# EAGLE board Esquematico_Encoder (EAGLE 9.6.2)
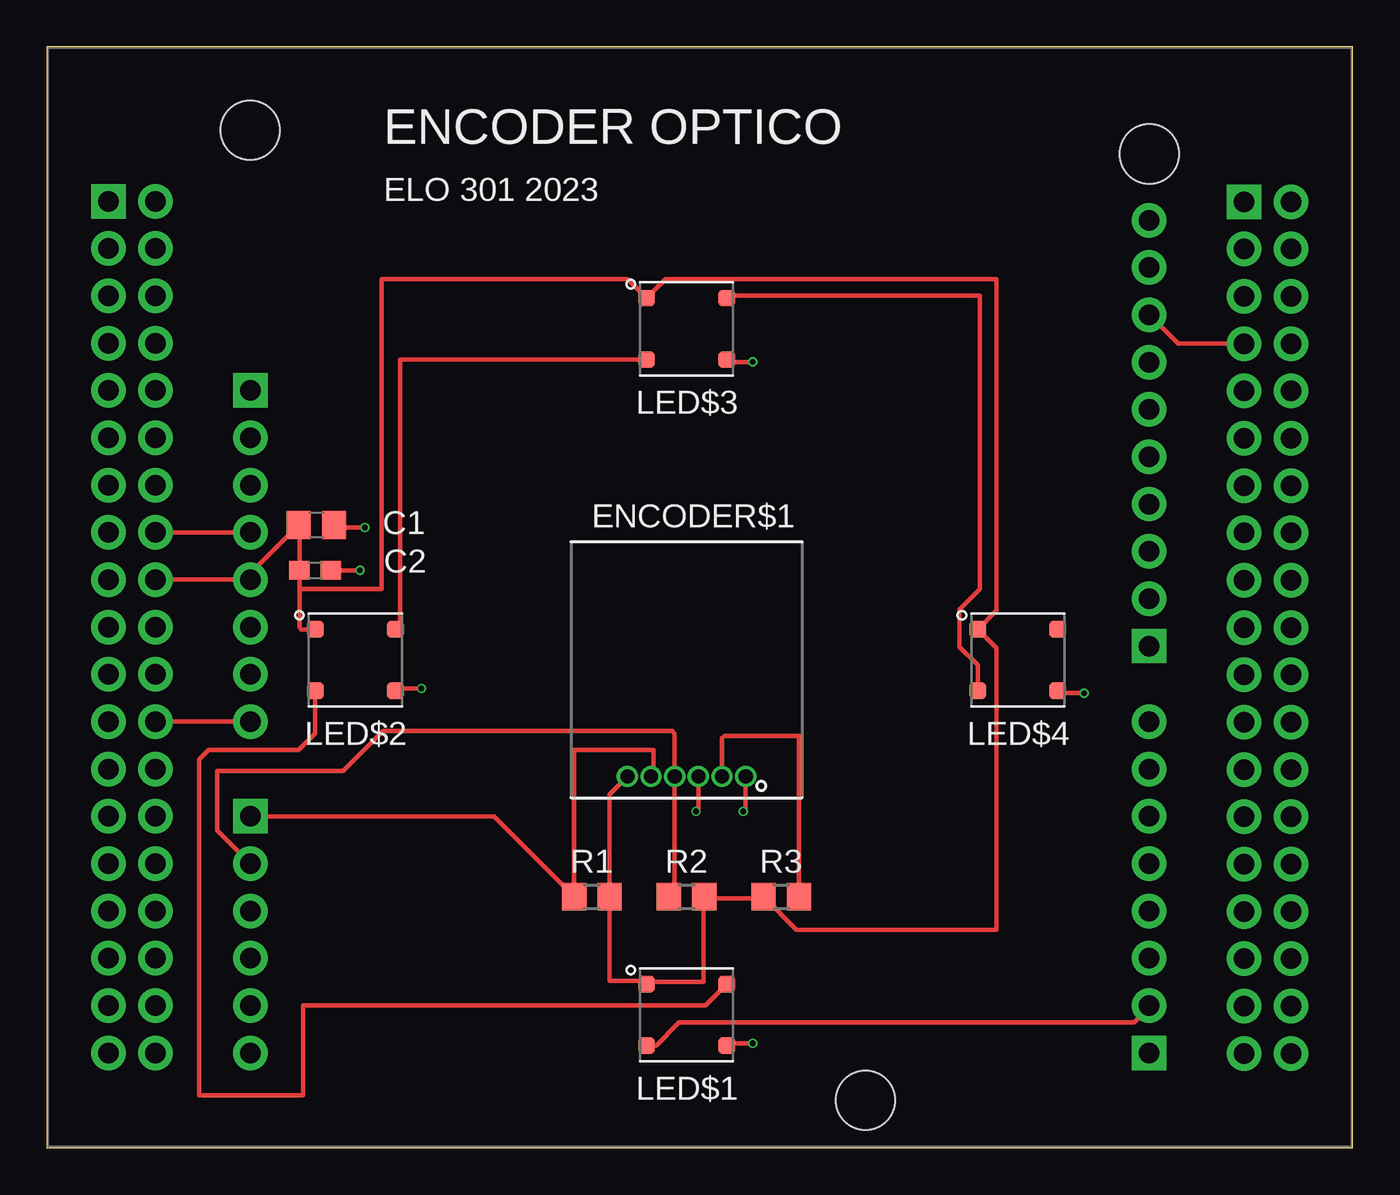
[diagram p0: board, top side]
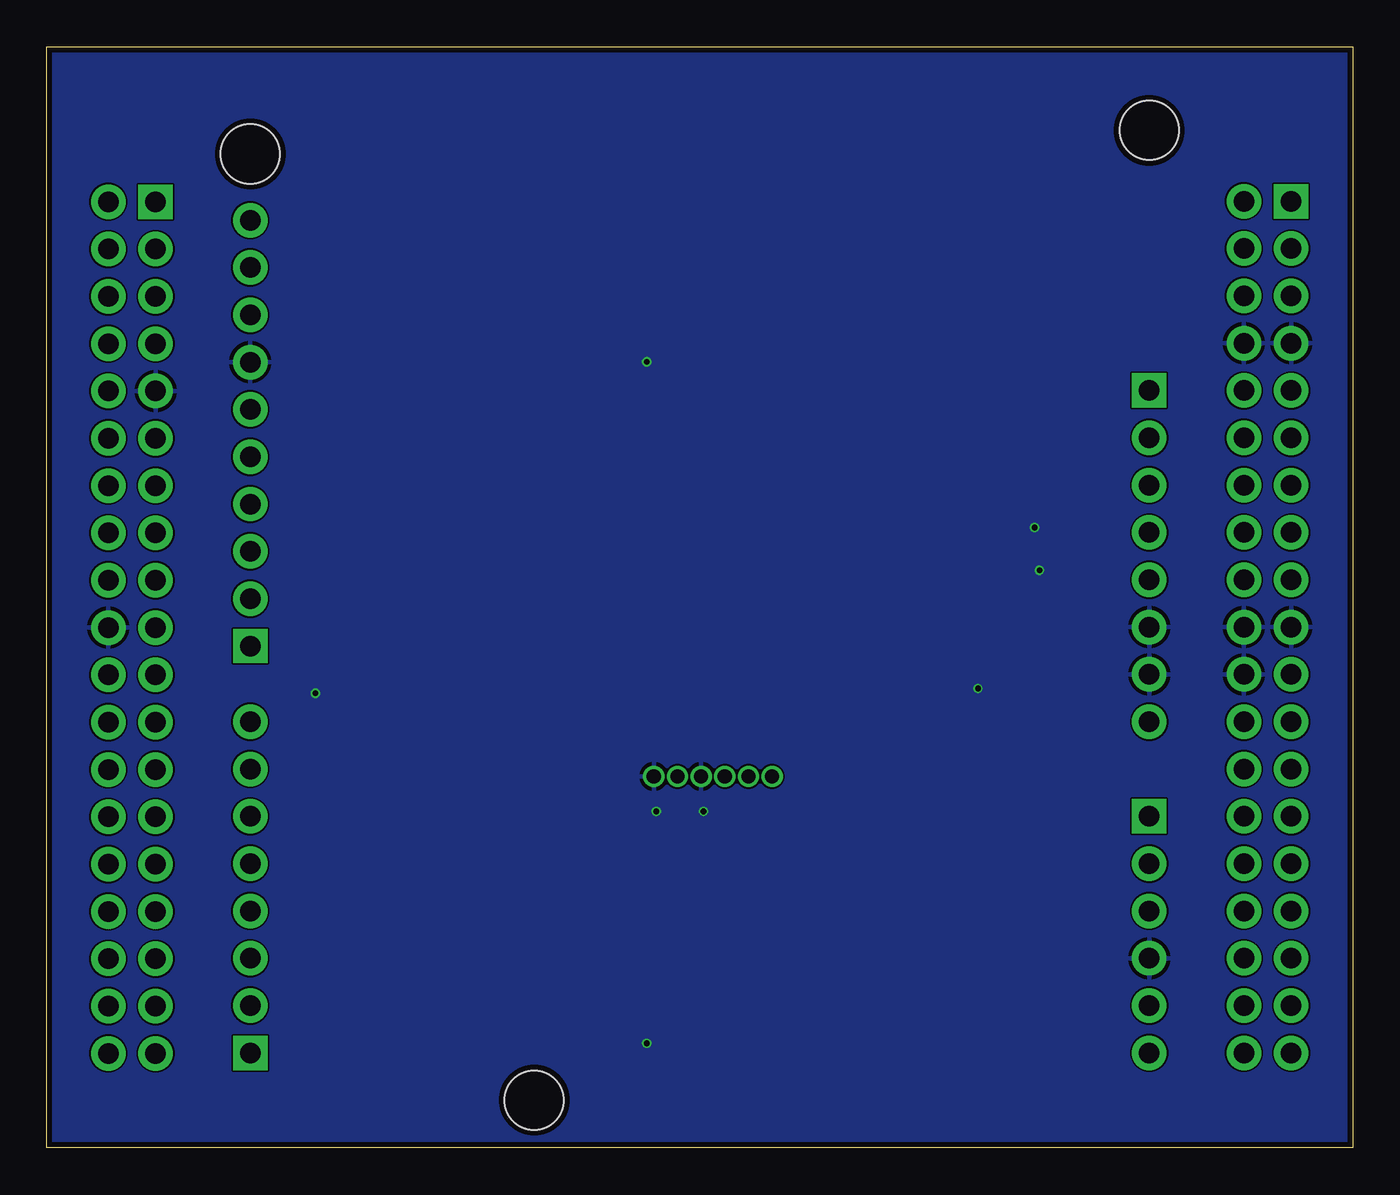
[diagram p1: board, bottom side, seen from below]

Size 70.13 x 59.13 mm. Coordinates in mm from the lower left corner, seen from the top.
Outline: 0,0 70.13,0 70.13,59.13 0,59.13 0,0
Copper layers (1*16): Top 0.035mm / dielectric 1.5mm / Bottom 0.035mm
Design rules "PCBWay_2L_100um-Track": minimum track width 0.1mm, minimum drill 0.3mm, track to track 0.1mm, track to pad 0.1mm, pad to pad 0.1mm, via to via 0.1mm, smd to smd 0mil, copper to edge 0.3mm, drill to drill 10mil, minimum pad ring 6mil, minimum via ring 0.1mm, stop-mask expansion 2mil, vias tented up to drill 0.45mm, thermal gap 0.2mm

## Footprints (pad centres in the part's own frame; a part is rotated, then mirrored left to right if it is on the bottom)
C0805 = smd 1.3 x 1.5: 1 -0.95,0; 2 0.95,0
C0603 = smd 1.1 x 1: 1 -0.85,0; 2 0.85,0
TRAY = drill 0.76 pad 0.96: 1 3.175,-6.25; 2 1.905,-6.25; 3 0.635,-6.25; 4 -0.635,-6.25; 5 -1.905,-6.25; 6 -3.175,-6.25
WS2812B = smd 0.9 x 0.9: 1 -2.15,1.65; 2 -2.15,-1.65; 3 2.15,-1.65; 4 2.15,1.65
NUCLEO-64 = drill 1.1 pad 1.85 square: CN5-1 59.13,24.884; CN6-1 10.87,38.6; CN7-1 3.25,48.76; CN8-1 10.87,15.74; CN9-1 59.13,3.04; CN10-1 64.21,48.735 | drill 1.1 pad 1.85: CN5-2 59.13,27.424; CN5-3 59.13,29.964; CN5-4 59.13,32.504; CN5-5 59.13,35.044; CN5-6 59.13,37.584; CN5-7 59.13,40.124; CN5-8 59.13,42.664; CN5-9 59.13,45.204; CN5-10 59.13,47.744; CN6-2 10.87,36.06; CN6-3 10.87,33.52; CN6-4 10.87,30.98; CN6-5 10.87,28.44; CN6-6 10.87,25.9; CN6-7 10.87,23.36; CN6-8 10.87,20.82; CN7-2 5.79,48.76; CN7-3 3.25,46.22; CN7-4 5.79,46.22; CN7-5 3.25,43.68; CN7-6 5.79,43.68; CN7-7 3.25,41.14; CN7-8 5.79,41.14; CN7-9 3.25,38.6; CN7-10 5.79,38.6; CN7-11 3.25,36.06; CN7-12 5.79,36.06; CN7-13 3.25,33.52; CN7-14 5.79,33.52; CN7-15 3.25,30.98; CN7-16 5.79,30.98; CN7-17 3.25,28.44; CN7-18 5.79,28.44; CN7-19 3.25,25.9; CN7-20 5.79,25.9; CN7-21 3.25,23.36; CN7-22 5.79,23.36; CN7-23 3.25,20.82; CN7-24 5.79,20.82; CN7-25 3.25,18.28; CN7-26 5.79,18.28; CN7-27 3.25,15.74; CN7-28 5.79,15.74; CN7-29 3.25,13.2; CN7-30 5.79,13.2; CN7-31 3.25,10.66; CN7-32 5.79,10.66; CN7-33 3.25,8.12; CN7-34 5.79,8.12; CN7-35 3.25,5.58; CN7-36 5.79,5.58; CN7-37 3.25,3.04; CN7-38 5.79,3.04; CN8-2 10.87,13.2; CN8-3 10.87,10.66; CN8-4 10.87,8.12; CN8-5 10.87,5.58; CN8-6 10.87,3.04; CN9-2 59.13,5.58; CN9-3 59.13,8.12; CN9-4 59.13,10.66; CN9-5 59.13,13.2; CN9-6 59.13,15.74; CN9-7 59.13,18.28; CN9-8 59.13,20.82; CN10-2 66.75,48.735; CN10-3 64.21,46.195; CN10-4 66.75,46.195; CN10-5 64.21,43.655; CN10-6 66.75,43.655; CN10-7 64.21,41.115; CN10-8 66.75,41.115; CN10-9 64.21,38.575; CN10-10 66.75,38.575; CN10-11 64.21,36.035; CN10-12 66.75,36.035; CN10-13 64.21,33.495; CN10-14 66.75,33.495; CN10-15 64.21,30.955; CN10-16 66.75,30.955; CN10-17 64.21,28.415; CN10-18 66.75,28.415; CN10-19 64.21,25.875; CN10-20 66.75,25.875; CN10-21 64.21,23.335; CN10-22 66.75,23.335; CN10-23 64.21,20.795; CN10-24 66.75,20.795; CN10-25 64.21,18.255; CN10-26 66.75,18.255; CN10-27 64.21,15.715; CN10-28 66.75,15.715; CN10-29 64.21,13.175; CN10-30 66.75,13.175; CN10-31 64.21,10.635; CN10-32 66.75,10.635; CN10-33 64.21,8.095; CN10-34 66.75,8.095; CN10-35 64.21,5.555; CN10-36 66.75,5.555; CN10-37 64.21,3.015; CN10-38 66.75,3.015 | hole 3.175: 59.13,51.3; 10.87,52.57; 43.89,0.5
R0805 = smd 1.3 x 1.5: 1 -0.95,0; 2 0.95,0

## Placement (x,y rotation side)
C1  1pF  [C0805]  14.49,33.45 0 top
C2  10nF 0603  [C0603]  14.42,31.01 0 top
ENCODER$1  291V1022F832AB  [TRAY]  34.35,26.2 0 top
LED$1  WS2812B  [WS2812B]  34.35,7.15 0 top
LED$2  WS2812B  [WS2812B]  16.57,26.2 0 top
LED$3  WS2812B  [WS2812B]  34.35,43.98 0 top
LED$4  WS2812B  [WS2812B]  52.13,26.2 0 top
M1  [NUCLEO-64]  0.06,2.07 0 top
R1  2.2k  [R0805]  29.27,13.5 0 top
R2  2.2k  [R0805]  34.35,13.5 0 top
R3  4.7k  [R0805]  39.43,13.5 0 top

## Library data of the parts
C1 = rcl; PARTNO: GCM21BR71E105KA56L; SPICEPREFIX: C
C2 = rcl; PARTNO: GCM188R72A103KA37D; SPICEPREFIX: C
ENCODER$1 = Shield_Encoder; PARTNO: 291V1022F832AB
LED$1-LED$4 = Shield_Encoder; PARTNO: WS2812B
M1 = NUCLEO-L452RE
R1 R2 = rcl; PARTNO: CR0805-JW-222ELF; SPICEPREFIX: R
R3 = rcl; PARTNO: RC0805FR-074K7L; SPICEPREFIX: R

## Nets
+3V3: M1.CN6-4 M1.CN7-16
+5V: C1.1 C2.1 ENCODER$1.6 LED$1.1 LED$2.1 LED$3.1 LED$4.1 M1.CN6-5 M1.CN7-18 R1.2 R2.2 R3.1
AGND: M1.CN10-32
AVDD: M1.CN5-8 M1.CN10-7
GND: C1.2 C2.2 ENCODER$1.1 ENCODER$1.3 LED$1.3 LED$2.3 LED$3.3 LED$4.3 M1.CN5-7 M1.CN6-6 M1.CN6-7 M1.CN7-7 M1.CN7-8 M1.CN7-19 M1.CN7-20 M1.CN7-22 M1.CN8-4 M1.CN10-9 M1.CN10-20
IOREF: M1.CN6-2
N$1: LED$1.4 LED$2.2
N$2: LED$2.4 LED$3.2
N$3: LED$3.4 LED$4.2
N$4: ENCODER$1.5 M1.CN8-1 R1.1
N$5: ENCODER$1.4 M1.CN8-2 R2.1
N$6: ENCODER$1.2 R3.2
N$7: LED$1.2 M1.CN9-2
U5V: M1.CN10-8
VBAT: M1.CN7-33
VDD: M1.CN7-5
VIN: M1.CN6-8 M1.CN7-24

## Tracks (layer width: path | path; a pad name or v marks a point on that pad's centre or on a via)
+3V3
  Top 0.254: M1.CN7-16 M1.CN6-4
+5V
  Top 0.254: LED$2.1 13.66,27.85 13.57,27.93 13.57,30.01 | 13.57,30.01 C2.1 13.57,33.42 C1.1 10.93,30.85 M1.CN6-5 M1.CN7-18 | 35.4,13.4 38.39,13.4 R3.1 40.26,11.72 51,11.72 51,26.83 LED$4.1 51,28.86 51,46.64 33.22,46.64 LED$3.1 31.19,46.64 17.98,46.64 17.98,30.01 13.57,30.01 | 35.4,13.4 35.25,13.4 35.25,8.92 32.33,8.92 LED$1.1 32.02,8.98 30.22,8.98 R1.2 30.22,18.99 ENCODER$1.6 | R2.2 35.4,13.4
AVDD
  Top 0.254: M1.CN10-7 60.74,43.18 M1.CN5-8
GND  (via drill 0.3)
  Top 0.254: C1.2 15.58,33.31 v17.08,33.31 | C2.2 16.81,31.01 v16.83,31.02 | LED$2.3 18.85,24.67 v20.13,24.67 | LED$1.3 36.63,5.62 v37.91,5.62 | LED$4.3 54.41,24.42 v55.69,24.42 | LED$3.3 36.63,42.2 v37.91,42.2 | ENCODER$1.1 37.53,18.19 v37.4,18.07 | ENCODER$1.3 34.99,18.19 v34.86,18.07
  pour Bottom: 0.06,0.03 70.17,0.03 70.17,58.96 0.06,58.96
N$1
  Top 0.254: LED$1.4 35.36,7.65 13.78,7.65 13.78,2.83 8.19,2.83 8.19,20.86 8.7,21.37 13.53,21.37 14.42,22.27 LED$2.2
N$2
  Top 0.254: LED$2.4 18.98,28.1 18.98,42.33 LED$3.2
N$3
  Top 0.254: LED$4.2 49.98,25.92 49,26.9 49,28.9 50.1,30.01 50.1,45.75 36.63,45.75 LED$3.4
N$4
  Top 0.254: M1.CN8-1 24.01,17.81 R1.1 28.32,21.37 32.58,21.37 32.58,20.07 ENCODER$1.5
N$5
  Top 0.254: R2.1 33.72,13.81 ENCODER$1.4 33.72,22.26 33.59,22.39 18.05,22.39 15.92,20.25 9.16,20.25 9.16,17.04 M1.CN8-2
N$6
  Top 0.254: R3.2 40.38,22.13 36.39,22.13 36.26,22 ENCODER$1.2
N$7
  Top 0.254: LED$1.2 32.71,5.5 33.96,6.74 58.39,6.74 59.19,7.54 M1.CN9-2
VIN
  Top 0.254: M1.CN7-24 M1.CN6-8

## Text on the board
tPlace: ENCODER OPTICO | ELO 301 2023